# Altium PCB TramHanSTM8S_V2_HOAN_TAT.PcbDoc
Units mm, origin at the board's own origin, x right, y up, seen from the top; angles counter-clockwise.
Board outline 72.17 x 32.38 mm, 2 copper layers (Top Layer, Bottom Layer); 49 components, 43 nets, 180 pads, 116 vias.
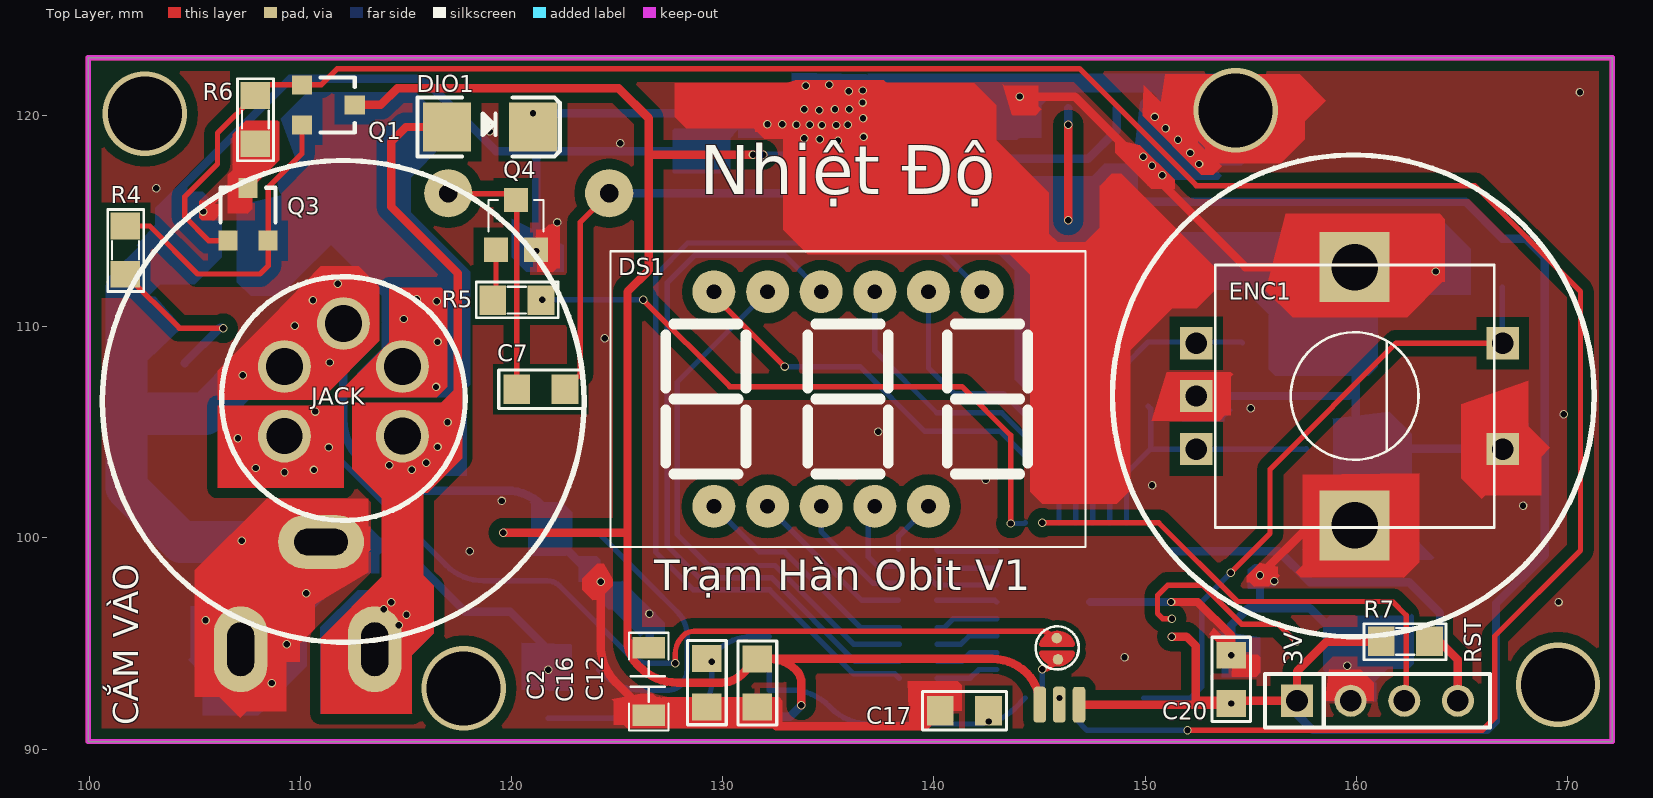
[diagram p0: Top Layer view]
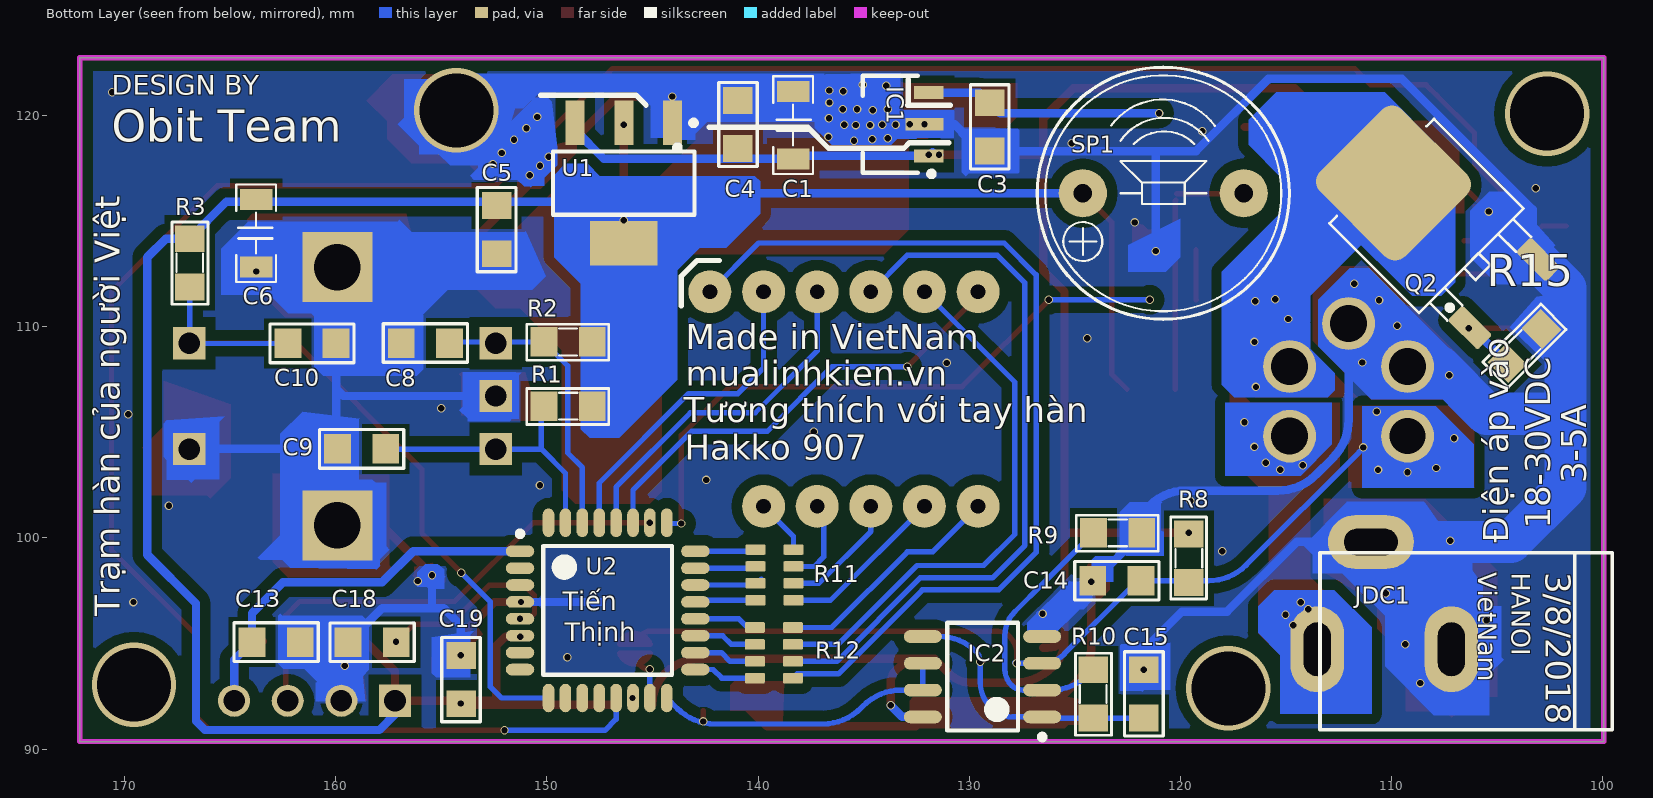
[diagram p1: Bottom Layer view, seen from below]
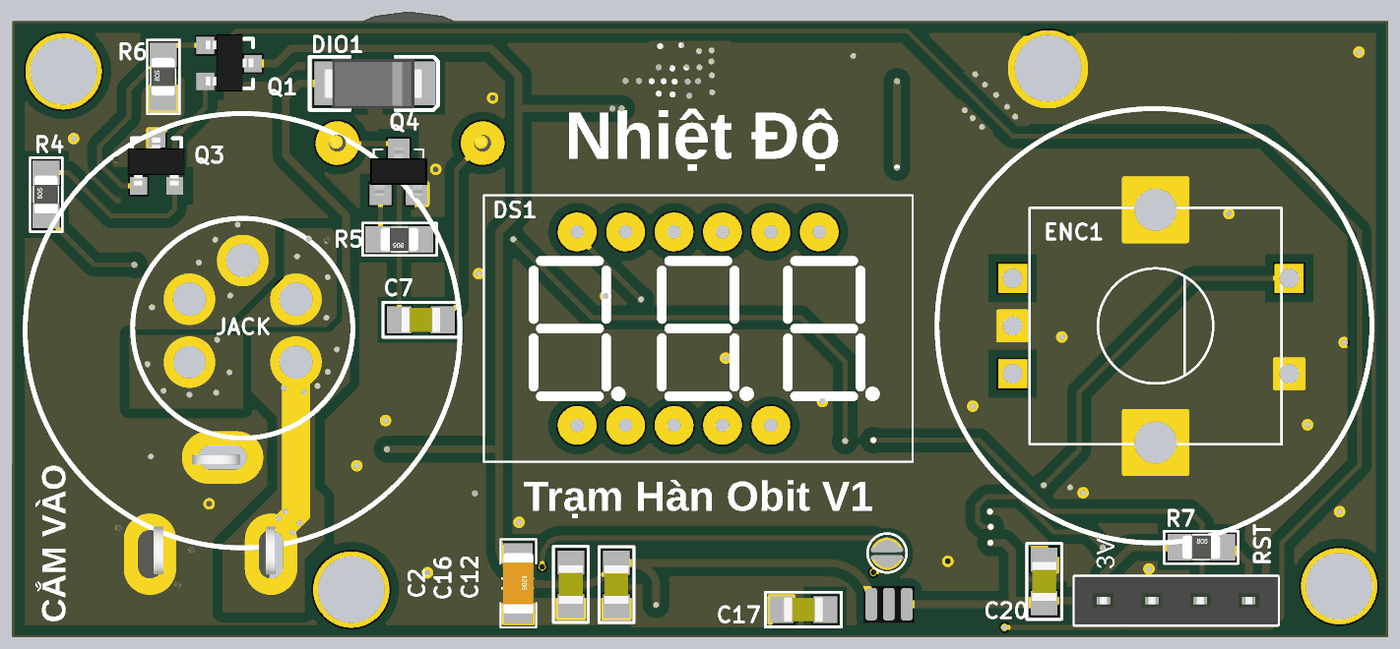
[diagram p2: 3D render of the assembled board from above, using the file's embedded part models]
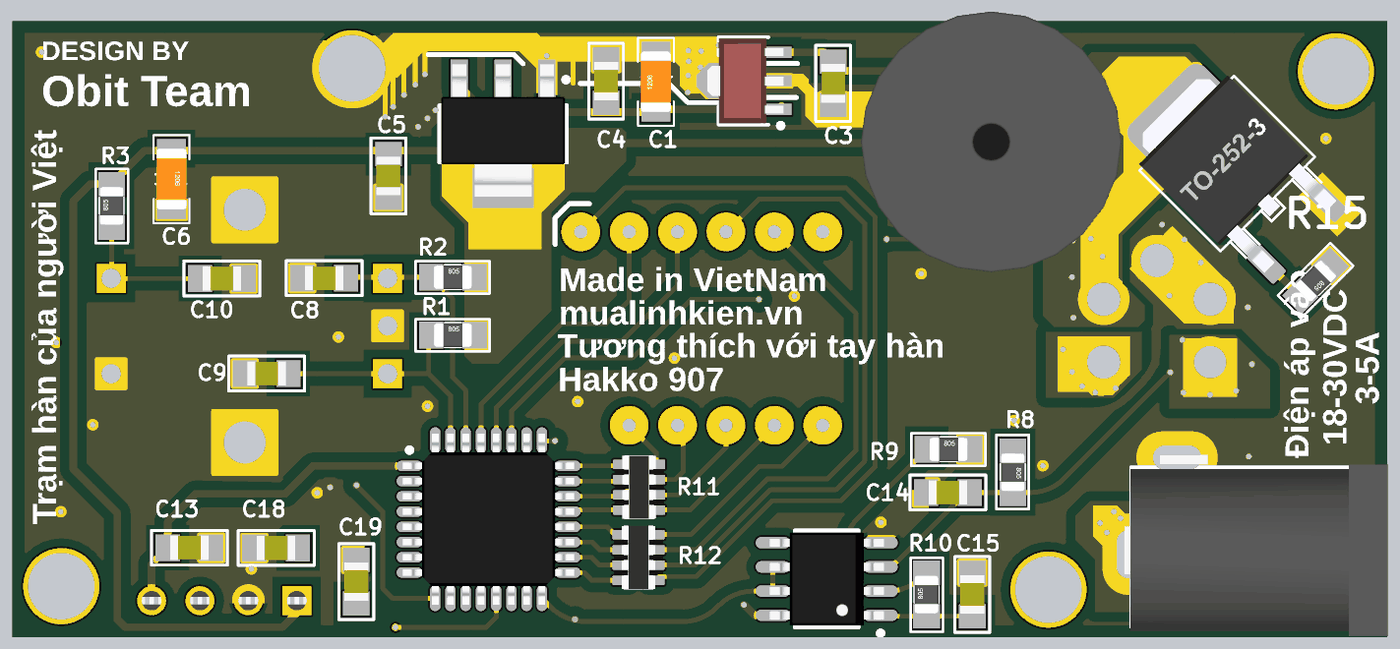
[diagram p3: 3D render of the assembled board from below, using the file's embedded part models]

## Layer stack, top to bottom
Top Solder: solder mask 0.0102, Solder Resist, Dk 3.5
Top Layer: signal copper 0.0356
Dielectric 1: dielectric 0.32, FR-4, Dk 4.8
Bottom Layer: signal copper 0.0356
Bottom Solder: solder mask 0.0102, Solder Resist, Dk 3.5

## Board outline
99.95,90.36 172.12,90.36 172.12,122.74 99.95,122.74

## Design rules (kind name [scope] priority, off if disabled: settings)
Clearance [All] p1: gap=0.1 ignorepadtopadclearanceinfootprint=FALSE
PolygonConnect [All] p1: connectstyle=Relief reliefconductorwidth=0.254 reliefentries=4 polygonreliefangle="90 Angle" airgapwidth=0.254
RoutingVias [All] p1: holewidth=0.3 width=0.4 viastyle="Through Hole" minholewidth=0.3 minwidth=0.4 maxholewidth=0.3 maxwidth=0.4
SolderMaskExpansion [All] p1: expansion=0.102
Width [All] p1: maxlimit=2 minlimit=0.254 preferedwidth=0.4
30 further rules are at their usual default settings.

## Components (designator, comment, footprint, x,y, rotation, side; value= is the part's Value field where it differs from the comment)
C1 "CAP" "C 1206" 138.337,119.549 r90 bottom value=*uF
C2 "CAP" "C 1206" 126.492,93.202 r270 top value=*uF
C3 "104" SM-0805 129.031,119.464 r90 bottom value=103
C4 "104" SM-0805 140.951,119.578 r270 bottom value=103
C5 "104" SM-0805 152.378,114.6 r90 bottom value=103
C6 "CAP" "C 1206" 163.765,114.433 r270 bottom value=*uF
C7 "104" SM-0805 121.386,107.041 r180 top value=103
C8 "104" SM-0805 155.75,109.23 r0 bottom value=103
C9 "104" SM-0805 158.77,104.22 r0 bottom value=103
C10 "104" SM-0805 161.12,109.21 r180 bottom value=103
C12 "106" SM-0805 131.638,93.131 r90 top value=103
C13 "104" SM-0805 162.82,95.07 r0 bottom value=103
C14 "104" SM-0805 123.01,97.97 r180 bottom value=103
C15 "104" SM-0805 121.73,92.613 r90 bottom value=103
C16 "104" SM-0805 129.247,93.145 r270 top value=103
C17 "104" SM-0805 141.445,91.821 r180 top value=103
C18 "106" SM-0805 158.272,95.059 r0 bottom value=103
C19 "104" SM-0805 154.064,93.291 r90 bottom value=103
C20 "104" SM-0805 154.081,93.306 r90 top value=103
DIO1 "Diode SMD" DIO-SMD-106 118.978,119.46 r180 top value=1N5007
DS1 "7SEG" "LED 7 SEG 3 DIGIT" 135.93,106.579 r0 top
ENC1 "enc" ENC 159.793,116.881 r270 top locked
IC1 "LM7805 SOT89" SOT89-321 133.715,119.59 r0 bottom
IC2 "LM358" SO8 129.37,93.43 r0 bottom
JACK "907" "jack 907" 115.719,107.868 r180 top locked (schematic designator "jack 1")
JDC1 "Jac DC" DC0 110.345,97.27 r0 bottom
Q1 "2N3904" SOT23-231 111.323,120.505 r270 top value=C1815
Q2 "IRF840" TO252-123 107.289,114.188 r135 bottom
Q3 "2N3906" SOT23-231 107.519,115.328 r0 top value=A1015
Q4 "C1815" "SOT 23" 120.213,114.821 r0 top
R1 "10k" SM-RES-0805 150.136,106.24 r180 bottom value="R1/4W - 1K"
R2 "10k" SM-RES-0805 150.14,109.28 r180 bottom value="R1/4W - 1K"
R3 "10k" SM-RES-0805 166.91,111.884 r90 bottom value="R1/4W - 1K"
R4 "22R" SM-RES-0805 101.717,112.483 r90 top value="R1/4W - 1K"
R5 "1k" SM-RES-0805 121.396,111.259 r180 top value="R1/4W - 1K"
R6 "1k" SM-RES-0805 107.863,118.67 r90 top value="R1/4W - 1K"
R7 "10k" SM-RES-0805 161.177,95.101 r0 top value="R1/4W - 1K"
R8 "10k" SM-RES-0805 119.6,100.18 r270 bottom value="R1/4W - 1K"
R9 "1k" SM-RES-0805 124.116,100.24 r180 bottom value="R1/4W - 1K"
R10 "24k" SM-RES-0805 124.13,91.47 r90 bottom value="R1/4W - 1K"
R11 "RP330" RESCAXS50P160X320X70-8N 139.22,98.25 r180 bottom
R12 "RP330" RESCAXS50P160X320X70-8N 139.25,94.56 r180 bottom
R15 "10k" SM-RES-0805 102.9,109.892 r315 bottom value="R1/4W - 1K"
RST "JP4" JP4-C1T 157.19,92.29 r0 top (schematic designator C11)
SB "" SB_3 147.538,93.318 r180 top
SB2 "SB" SB 144.228,96.352 r270 top
SP1 "Speaker" SPEAKER 120.81,116.32 r180 bottom locked value="Speaker Chip"
U1 "AMS1117" "SOT 223" 146.357,116.803 r0 bottom
U2 "STM8S003K3" TQFP32 147.12,96.57 r180 bottom

## Footprints (in the part's own frame and the unit in brackets; to place one, negate y for a bottom-side part, rotate by r counter-clockwise, add the part's x,y. Pads: shape width x height; smd on the part's side, far side on the other; paste and mask are expansions set on the pad)
"C 1206" [mm]
  rect 1x1.524 smd: 1(-1.6,0) 2(1.6,0)
  silkscreen extent -2.31,-0.94 2.31,0.94, body extent -1.6,-0.8 1.6,0.8, height 1
DC0 [mil] "Jac DC input"
  oval 100x160 hole 50 slot 100 at 90 deg: 1(125,100) 2(-125,100)
  oval 160x100 hole 50 slot 100 at 0 deg: 3(25,-100)
  silkscreen extent -425,-80 120,250, body extent -410,-105 134,269, height 434
DIO-SMD-106 [mil]
  rect 90x90.55 smd: 1(80,0) 2(-80,0)
  silkscreen extent -130,-55 135,55, body extent -99,-50 106,52, height 95
ENC [mil] "encoder"
  rect 60x60 hole 40: A(301.57,-290.28) B(499,-290.28) C(400,-290.28) D(301.57,281) E(499,281)
  rect 130.51x130.5 hole 87: GND1(159.84,5)
  rect 130.5x130.5 hole 87: GND2(641,5)
  silkscreen extent 156,-255 645,265
"jack 907" [mm]
  round 2.5 hole 1.75: 1(0.889,3.048) 2(0.889,-0.254) 3(6.477,-0.254) 5(3.683,-2.286)
  round 2.5 hole 1.7: 4(6.477,3.048)
  silkscreen extent -2.09,-4.5 9.45,7.04
JP4-C1T [mm] "4 row, straight, gold plating"
  rect 1.52x1.52 hole 1.02: 1(0,0)
  round 1.52 hole 1.02: 2(2.54,0) 3(5.08,0) 4(7.62,0)
  silkscreen extent -1.52,-1.27 9.14,1.27, body extent -1.52,-1.25 9.14,1.25, height 8.51
"LED 7 SEG 3 DIGIT" [mil] "LD-3361BS"
  round 80 hole 27.56: 1(-250,-200) 2(-150,-200) 3(-50,-200) 4(50,-200) 5(150,-200) 6(250,200) 7(150,200) 8(50,200) 9(-50,200) 10(-150,200) 11(-250,200)
  round 30 on Top Overlay: 12(-165,-135) 12(100,-135) 12(360,-135)
  silkscreen extent -443,-276 443,276
RESCAXS50P160X320X70-8N [mm]
  round 0.254 on Mech15: 0(0,0)
  rrect25% 0.95x0.5 smd: 1(-0.9,1.2) 2(-0.9,0.4) 3(-0.9,-0.4) 4(-0.9,-1.2) 5(0.9,-1.2) 6(0.9,-0.4) 7(0.9,0.4) 8(0.9,1.2)
  Top Layer pour cut-out: -0.4,1.7 0.4,1.7 0.4,-1.7 -0.4,-1.7
  body extent -0.87,-1.68 0.88,1.67, height 0.7
SB [mm]
  round 0.5 smd: 1(1.095,1.585) 2(2.105,1.645)
  Top Layer region: 0.865,1.611 0.93,1.919 1.114,2.174 1.385,2.334 1.385,2.334 1.388,0.878 1.114,1.04 0.929,1.3 0.865,1.611
  Top Layer region: 2.321,1.612 2.256,1.92 2.072,2.176 1.8,2.335 1.8,2.335 1.803,0.879 2.075,1.042 2.258,1.301 2.321,1.612
  Top Layer lines w0.254: 0.867,1.601 ccw(c1.629,1.601) 0.938,1.279 ccw(c1.629,1.601) 1.388,0.878 1.385,2.334 ccw(c1.627,1.611) 0.865,1.611 ; 2.323,1.602 cw(c1.561,1.602) 2.306,1.444 cw(c1.561,1.602) 1.803,0.879 1.8,2.335 cw(c1.559,1.612) 2.321,1.612
  silkscreen extent 0.54,0.59 2.58,2.63
SB_3 [mm]
  rrect50% 0.6x1.7 smd: 1(0.67,1.215) 2(1.605,1.21) 3(2.53,1.21)
SM-0805 [mil] "Compoment SMD 80x50mil"
  rect 50x55 smd: 1(-45,0) 2(45,0)
  silkscreen extent -78,-36 78,36, body extent -40,-25 40,25, height 24
SM-RES-0805 [mil]
  rect 50x55 smd: 1(0,0) 2(90,0)
  silkscreen extent -32,-34 121,33, body extent 6,-25 84,25, height 31
SO8 [mm] "SOIC, 8-Leads, Body 4.9x3.9mm, Pitch 1.27mm, IPC High Density"
  oval 1.8x0.6 smd: 1(-2.825,1.905) 2(-2.825,0.635) 3(-2.825,-0.635) 4(-2.825,-1.905) 5(2.825,-1.905) 6(2.825,-0.635) 7(2.825,0.635) 8(2.825,1.905)
  silkscreen extent -2.95,-2.55 1.68,2.98, body extent -2.99,-2.45 3,2.45, height 1.6
SOT23-231 [mm]
  rect 0.9x0.95 smd mask+0: 1(0.95,-1.25)
  rect 0.9x0.95 smd: 2(-0.95,-1.25) 3(0,1.25)
  silkscreen extent -1.3,-0.38 1.3,1.25, body extent -1.52,-1.23 1.48,1.27, height 1.06
SOT89-321 [mm] "SOT89, 3-Leads, Body 4.55x2.55mm, Pitch 1.50mm, Lead Span 4.1mm, IPC Medium Density"
  rect 1.4x0.6 smd: 1(-1.8,-1.5) 3(-1.8,1.5)
  rect 1.8x0.6 smd: 2(-1.6,0)
  Top Layer region: -0.7,0.3 -0.05,0.95 1.85,0.95 2.5,0.3 2.5,-0.3 1.85,-0.95 -0.05,-0.95 -0.7,-0.3
  silkscreen extent -2.05,-2.3 1.32,2.47, body extent -2.08,-2.25 1.92,2.25, height 1.5
"SOT 23" [mil]
  rect 45x45 smd: 1(-37.4,-46.26) 2(37.4,-46.26) 3(0,46.26)
  silkscreen extent -51,-12 51,46, body extent -59,-50 59,50, height 43
"SOT 223" [mm]
  rect 0.9x2.1 smd: 1(-2.3,-2.85) 2(0,-2.85) 3(2.3,-2.85)
  rect 3.2x2.1 smd: 4(0,2.85)
  silkscreen extent -3.42,-2.97 3.35,1.5, body extent -3.25,-3.66 3.25,3.3, height 1.66
SPEAKER [mil]
  round 90 hole 35: 1(-150,0) 2(150,0)
  silkscreen extent -235,-235 235,235, body extent -267,-267 273,272, height 299
TO252-123 [mm]
  round 0.5 on Mech15: 0(0,0)
  rrect25% 1x2 smd: 1(-2.285,-3.7) 3(2.285,-3.7)
  rrect25% 5.5x5.7 smd: 2(0,3.7)
  silkscreen extent -3.5,-2.7 3.5,4.5, body extent -3.3,-3.95 3.3,5.76, height 2.31
TQFP32 [mm] "Thin QFP, 32-Leads, Body 9x9mm, Pitch 0.8mm, IPC Low Density"
  oval 1.35x0.55 smd: 1(-4.15,2.8) 2(-4.15,2) 3(-4.15,1.2) 4(-4.15,0.4) 5(-4.15,-0.4) 6(-4.15,-1.2) 7(-4.15,-2) 8(-4.15,-2.8) 17(4.15,-2.8) 18(4.15,-2) 19(4.15,-1.2) 20(4.15,-0.4) 21(4.15,0.4) 22(4.15,1.2) 23(4.15,2) 24(4.15,2.8)
  oval 0.55x1.35 smd: 9(-2.8,-4.15) 10(-2,-4.15) 11(-1.2,-4.15) 12(-0.4,-4.15) 13(0.4,-4.15) 14(1.2,-4.15) 15(2,-4.15) 16(2.8,-4.15) 25(2.8,4.15) 26(2,4.15) 27(1.2,4.15) 28(0.4,4.15) 29(-0.4,4.15) 30(-1.2,4.15) 31(-2,4.15) 32(-2.8,4.15)
  silkscreen extent -4.28,-3.05 3.05,3.75, body extent -4.5,-4.5 4.5,4.5, height 1.4

## Part data
C3 C4 C5 C7 C8 C9 C10 C12 C13 C14 C15 C16 C17 C18 C19 C20: library part CM, "Cap SMD"
DIO1: "Default Diode", Code - JEDEC=DO-214-AB, Published=8-Jun-2000, Publisher="Altium Limited", Revision="July-2002: Re-released for DXP Platform."
DS1: library part "LED 7 SEG 3 DIGIT"
ENC1: library part ENC
IC1: library part LM78xx, "Positive Voltage Regulator", ComponentLink1Description="Manufacturer Link", ComponentLink1URL=http://www.st.com/, ComponentLink2Description=Datasheet, ComponentLink2URL=http://www.st.com/stonline/products/literature/ds/2146/l78m05c.pdf, DatasheetVersion=Apr-1994, LatestRevisionDate=17-Jul-2002, LatestRevisionNote="Re-released for DXP Platform.", Note="Tab is connected to pin 3 (GND).", PackageDescription="TO, Thru-Hole, Vertical, Heatsink Mounted; 3 In-Line Leads; Pitch 2.54 mm; Pin sequence 1, 3, 2", PackageReference=ISOWATT220AB, PackageVersion=Jul-1998, Published=24-Aug-2001, Publisher="Altium Limited"
IC2: "Low-Power Dual Operational Amplifier"
JACK: library part "jack 907"
JDC1: library part DCIN, "Jac DC input"
Q1: library part 2N904, "NPN 600mW, ECB", =C2383
Q2: "MOSFET N - CHANNEL 500V - 0.75 - 8A - TO-220"
Q3: "PNP 600mW, ECB", =A1013
Q4: library part C1815_SMD
R1 R2 R3 R4 R5 R6 R7 R8 R9 R10 R15: library part R1/4W, "Resistor 1/4W"
R11 R12: library part ResPack
RST: "WR-PHD 2.54 mm Angled Socket Header", Manufacturer="W¨¹rth Elektronik eiSos GmbH", partNo=613004143121, ComponentLink1 Description=Manufacturer, ComponentLink1URL=http://www.we-online.com, ComponentLink2 Description=Datasheet, ComponentLink2URL=http://katalog.we-online.de/em/datasheet/6130xx143121.pdf, Created by="Karrer Zheng", Created Date="29 March 2013", NoPins=04
SB: library part SB_3
SP1: library part SPK, "Speaker Chip"
U1: library part AMS117
U2: "MCU 8BIT  8KB FLASH LQFP-32"

## Via types
v1: diameter 0.4, hole 0.3, Top Layer to Bottom Layer, tented both sides, 85 vias
v2: diameter 0.4, hole 0.3, Top Layer to Bottom Layer, 27 vias
v3: diameter 4, hole 3.5, Top Layer to Bottom Layer, 4 vias

## Nets (pads, with @x,y where several pads share a name; then routed paths per layer and width w, separated by ;. In a path a pad name is that pad's centre, name@x,y a point inside that pad or via, vN(x,y) a via of type N, cw(c..) or ccw(c..) an arc to the next point about the centre after c; other vN are vias at no path point)
3V3: C5.2 C6.1 C7.1 C19.1 C20.1 R1.2 R2.2 R3.2 R7.1 RST.1 SB.1 SP1.1 U1.2 U1.4 U2.6 | length 125.8
  Top Layer w0.254: C7.1 123.255,107.767 123.255,114.955 SP1.1
  Top Layer w0.4: v1(146.355,115.039) v1(146.355,119.57) ; SB.1 153.936,92.103 ccw(c153.936,92.308) v1(154.081,92.163) ; v1(151.252,95.329) 151.956,95.329 152.401,94.884 152.401,92.29 153.377,92.29 ; C20.1@154.081,92.29 RST.1 157.19,93.686 158.591,95.087 161.163,95.087 R7.1
  Bottom Layer w0.4: SP1.1 143.979,116.32 145.652,114.647 U1.4@146.355,114.647 ; v1(146.355,119.57) U1.2@146.355,120.347 ; R1.2 147.85,113.152 U1.4@146.355,114.647 ; RST.1 157.19,91.65 157.933,90.907 166.195,90.907 166.615,91.327 166.615,96.899 168.92,99.204 168.92,113.289 168.039,114.17 R3.2 166.91,114.185 165.169,115.926 147.634,115.926 U1.4@146.355,114.647
24V: DIO1.1 JACK.1 JDC1.1 | length 36.9
  Top Layer w0.4: JACK.1 116.125,104.82 117.457,106.152 117.457,112.529 114.297,115.689 114.297,118.759 114.998,119.46 DIO1.1
  Top Layer w2: JDC1.1 113.52,95.512 114.83,96.822 114.83,103.217 ; 114.83,103.447 JACK.1
  Bottom Layer w0.4: JDC1.1 JDC1.1@113.945,95.155 ; v1(113.945,96.618) JDC1.1@113.945,96.07 ; v1(114.2,103.447) 114.444,103.447 114.674,103.217 115.265,103.217 v1(115.275,103.227) ; v1(114.66,95.865) JDC1.1@114.378,95.865 ; 115.574,103.511 115.623,103.56 v1(115.957,103.56) ; JDC1.1@113.945,95.155 JDC1.1@113.945,95.992 ; JDC1.1@113.945,95.155 114.378,95.588 JDC1.1@114.378,95.865 ; JDC1.1@113.945,95.992 114.072,95.865 JDC1.1@114.378,95.865 ; JDC1.1@113.945,95.992 113.867,96.07 JDC1.1@113.945,96.07 ; JDC1.1@113.945,95.992 JDC1.1@113.945,96.07 ; JDC1.1@113.945,96.07 114.201,96.326 114.378,96.326 JDC1.1@114.378,95.865
  other v1: 115.025,96.368 114.301,96.963 116.493,104.308 116.968,105.484
"907 sensor": C14.2 IC2.3 JACK.4 R8.2 SB2.1 | length 39.9
  Top Layer w0.254: v2(127.748,94.065) 127.748,94.501 cw(c128.953,94.501) 128.101,95.353 cw(c128.654,94.8) 128.654,95.582 145.101,95.582 cw(c145.101,95.007) 145.507,95.414
  Top Layer w0.4: v1(107.88,103.313) 107.88,103.517
  Bottom Layer w0.254: JACK.4 JACK.4@109.731,104.82 ; 111.527,104.076 116.889,98.714 ccw(c118.685,100.51) 118.685,97.97 121.699,97.97 cw(c121.699,97.168) 122.266,97.735 125.505,94.496 ccw(c126.545,95.535) IC2.3 v2(127.748,94.065) ccw(c127.748,94.27) v2@127.859,94.098
  other v1: 109.247,103.104 110.642,103.22 111.339,104.285 107.043,104.715 110.697,105.986
GND: C1.2 C2.2 C3.1 C4.1 C5.1 C6.2 C8.2 C9.2 C10.2 C12.1 C13.1 C14.1 C15.2 C16.2 C17.2 C18.2 C19.2 C20.2 ENC1.C ENC1.E ENC1.GND1 ENC1.GND2 IC1.2 IC2.4 JACK.3 JACK.5 JDC1.2 JDC1.3 Q2.3 Q3.3 Q4.2 R6.1 R9.2 R15.1 RST.2 U1.1 U2.4 | length 249.8
  Top Layer w0.254: v1(105.401,115.455) 106.524,116.578 Q3.3 107.519,118.326 R6.1 ; v2(118.961,119.263) v2@119.029,119.263 ; v2@125.145,118.649 v2(125.145,118.694) ; v2(142.445,102.746) v2@142.473,102.746
  Top Layer w0.4: v1(107.269,107.699) v1@107.405,107.699 ; v1@108.593,93.13 v1(108.637,93.13) ; v1(121.163,113.585) Q4.2 ; v1(124.216,97.926) 124.216,94.93 ccw(c126.756,94.93) 124.96,93.134 C2.2 C12.1@130.969,91.602 ; C12.1 132.54,91.086 139.567,91.086 C17.2 ; v1(144.06,120.901) 146.666,120.901 154.746,112.821 ENC1.GND1 ; v1(151.228,96.968) 152.488,96.968 154.081,95.375 v1(154.081,94.449) ; v1(155.438,98.239) 157.799,100.6 ENC1.GND2
  Bottom Layer w0.254: Q2.3 103.133,113.187 Q2.3@103.326,113.187 ; Q2.3@103.326,113.38 v1(105.401,115.455) ; v2(126.527,96.408) v2@126.717,96.408 ; v2@148.97,94.357 v2(149.024,94.357) ; v2@150.326,102.454 v2(150.326,102.503) ; v2(163.765,112.617) C6.2
  Bottom Layer w0.4: Q2.3@103.326,113.187 103.326,113.38 103.326,115.559 109.507,121.74 115.838,121.74 119.257,118.321 121.263,118.321 ; v1@110.57,111.248 v1(110.593,111.248) ; JDC1.3 114.492,99.81 117.79,96.512 119.929,96.512 121.73,94.711 v2(121.73,93.756) ; JACK.5 112.036,105.589 ccw(c114.576,105.589) 112.78,103.793 113.589,102.984 ccw(c115.385,104.78) 115.385,102.24 119.763,102.24 cw(c119.763,99.894) 121.422,101.553 cw(c120.437,100.568) 121.83,100.568 R9.2 C14.1@124.1,97.97 ; v1(121.163,113.585) 121.163,118.221 121.263,118.321 ; C14.1@124.207,97.916 126.373,95.75 cw(c125.958,95.335) IC2.4 ; v1(132.819,119.59) v1(132.115,119.59) 130.692,119.59 129.423,118.321 C3.1 121.263,118.321 ; v1(133.934,121.409) 133.991,121.466 v1(135.046,121.466) 135.646,121.466 v1(135.963,121.149) 135.963,120.949 ; v1@134.641,119.552 v1(134.695,119.552) ; 134.782,119.767 v1(135.311,120.296) 135.963,120.949 ; v1(135.457,118.812) v1@135.49,118.812 ; v1(136.643,119.877) v1@136.643,119.9 ; v1@136.677,120.526 v1@136.677,120.64 ; U1.1@144.055,120.347 143.253,121.149 C1.2 136.164,121.149 135.963,120.949 ; 147.404,96.968 v1(151.228,96.968) ; C5.1 159.284,113.457 ENC1.GND1 ; ENC1.C 159.635,106.721 159.977,107.063 ; v1(154.081,94.449) 154.081,95.879 154.881,96.679 155.428,96.679 ; v1(155.438,98.239) 155.438,96.689 155.428,96.679 ; C8.2 159.957,109.23 C10.2 ; C18.2@159.433,94.99 159.73,94.693 RST.2 ; ENC1.GND2 159.913,100.607 C9.2 ; C13.1 161.666,95.059 C18.2 157.795,96.679 155.428,96.679 ; C6.2 159.932,112.833 ENC1.GND1 ; ENC1.E 166.917,104.22 C9.2 ; C9.2 159.977,104.284 159.977,107.063 ; ENC1.GND1 159.977,112.764 C10.2 ; 159.977,107.063 C10.2
  Bottom Layer w2: Q2.3@103.326,113.38 103.133,113.187 101.77,111.824 101.77,105.878 ; JDC1.2 107.17,99.778 107.138,99.81 104.359,99.81 101.77,102.399 101.77,105.878 ; v1@107.215,99.81 JDC1.3 ; JACK.5 111.274,110.154 JACK.3 107.739,108.122 105.495,105.878 101.77,105.878
  other v1: 109.359,94.967 105.509,96.104 107.215,99.866 111.384,108.309 109.734,110.05 111.768,112.04 150.814,117.176 150.325,117.631 152.553,117.707 149.904,118.052 152.131,118.231 151.557,118.855 134.587,118.877 133.858,118.921 136.666,118.989 150.966,119.395 135.381,119.552 133.488,119.573 134.119,119.573 135.925,119.573 150.46,119.936 134.576,120.248 133.858,120.302 135.994,120.299 136.62,120.618 136.632,121.187
  other v2: 159.574,93.956 169.575,96.964 110.272,97.377 156.117,97.959 118.021,99.377 167.894,101.53 119.528,101.751 137.365,105.029 169.814,105.85 155.002,106.139 131.068,108.287 124.413,109.462 122.162,114.941 103.167,116.56 170.588,121.102
  other v3: 154.28,120.25
LEFT: C8.1 ENC1.A R2.1 U2.30 | length 13.8
  Bottom Layer w0.254: U2.30 148.32,103.337 149.011,104.028 149.011,108.151 R2.1 154.557,109.28 C8.1
NetC3_2: C3.2 DIO1.2 IC1.1 | length 11.3
  Bottom Layer w0.4: v1(121.012,120.109) 128.533,120.109 C3.2 129.514,121.09 IC1.1
NetC7_2: C7.2 Q4.3 SP1.2 | length 12.1
  Top Layer w0.254: SP1.2 117.025,116.295 Q4.3@120.17,116.295 ; Q4.3 120.236,115.973 120.236,107.048 C7.2
NetC15_1: C15.1 C16.1 IC2.1 IC2.5 R10.1 | length 12.9
  Bottom Layer w0.254: C15.1 R10.1 126.412,91.47 ccw(c126.412,91.658) IC2.1 127.935,91.525 ccw(c127.935,92.993) 128.973,91.955 ccw(c127.754,93.174) 129.478,93.174 v1(129.478,94.135) cw(c130.164,94.135) 129.679,94.62 cw(c131.405,92.894) 131.405,95.335 IC2.5
NetC18_1: C18.1 U2.5 | length 9.5
  Top Layer w0.254: v1(151.27,96.17) 150.842,96.17 150.586,96.426 150.586,97.28 151.062,97.756 152.732,97.756 154.579,95.909 156.318,95.909 v1(157.146,95.081)
NetDS1_1: DS1.1 R12.8 | length 11.1
  Bottom Layer w0.254: DS1.1 131.734,99.345 132.933,99.345 136.518,95.76 R12.8
NetDS1_2: DS1.2 R11.5 | length 8
  Bottom Layer w0.254: DS1.2 136.569,97.05 R11.5
NetDS1_3: DS1.3 R11.6 | length 5.9
  Bottom Layer w0.254: DS1.3 134.66,100.315 137.125,97.85 R11.6
NetDS1_4: DS1.4 R11.7 | length 4.1
  Bottom Layer w0.254: DS1.4 136.892,101.191 136.892,99.096 137.338,98.65 R11.7
NetDS1_5: DS1.5 R11.8 | length 2.6
  Bottom Layer w0.254: R11.8 138.32,100.079 DS1.5
NetDS1_6: DS1.6 R12.5 | length 44.2
  Bottom Layer w0.254: R12.5 138.147,93.563 136.198,93.563 132.221,97.54 128.606,97.54 126.833,99.313 126.833,112.455 128.342,113.964 139.975,113.964 DS1.6
NetDS1_7: DS1.7 U2.29 | length 15.5
  Bottom Layer w0.254: DS1.7 139.74,108.043 140.95,106.833 143.289,106.833 147.52,102.602 U2.29
NetDS1_8: DS1.8 U2.28 | length 16.7
  Bottom Layer w0.254: DS1.8 137.2,108.859 140.131,105.928 143.206,105.928 146.72,102.414 U2.28
NetDS1_9: DS1.9 R12.6 | length 34.2
  Bottom Layer w0.254: DS1.9 132.937,113.382 128.669,113.382 127.369,112.082 127.369,99.644 128.904,98.109 132.322,98.109 136.271,94.16 R12.6
NetDS1_10: DS1.10 R12.7 | length 25.9
  Bottom Layer w0.254: DS1.10 127.843,107.382 127.843,100.17 129.318,98.695 132.474,98.695 136.209,94.96 R12.7
NetDS1_11: DS1.11 U2.27 | length 21.9
  Top Layer w0.254: DS1.11 129.58,111.463 v1(132.928,108.115)
  Bottom Layer w0.254: v1(132.928,108.115) 136.495,108.115 139.565,105.045 143.142,105.045 145.92,102.267 U2.27
NetIC2_2: IC2.2 R9.1 R10.2 | length 13.2
  Bottom Layer w0.254: R9.1 126.46,97.896 126.46,97.889 127.843,96.506 cw(c126.708,95.371) 128.313,95.371 128.313,93.78 cw(c127.244,93.78) 128,93.024 cw(c127.447,93.577) 127.447,92.795 IC2.2 126.143,92.795 cw(c126.143,95.335) 124.347,93.539 R10.2
"Netjack 1_2": JACK.2 Q2.2 | length 10.4
  Bottom Layer w2: Q2.2 114.83,111.879 v1@114.83,110.367 ; JACK.2 114.83,110.05
  other v1: 116.423,107.151 116.493,109.282 114.888,110.367 116.453,111.213 115.504,111.304
NetQ1_1: Q1.1 Q3.1 R4.2 | length 15.2
  Top Layer w0.254: R4.2 102.865,114.769 105.133,112.501 108.084,112.501 108.469,112.886 Q3.1 108.469,116.594 110.073,118.198 Q1.1
NetQ2_1: Q2.1 R4.1 R15.2 | length 8.2
  Top Layer w0.254: R4.1 104.268,109.932 v1(106.346,109.932)
  Bottom Layer w0.4: R15.2 106.196,109.956 Q2.1
NetQ4_1: Q4.1 R5.2 | length 2.4
  Top Layer w0.254: R5.2@119.254,111.27 119.263,111.279 Q4.1
NetR11_1: R11.1 U2.24 | length 2.9
  Bottom Layer w0.254: R11.1 140.2,99.37 U2.24
NetR11_2: R11.2 U2.23 | length 2.9
  Bottom Layer w0.254: R11.2 140.2,98.57 U2.23
NetR11_3: R11.3 U2.22 | length 3.3
  Bottom Layer w0.254: R11.3@139.837,98.053 140.12,97.77 U2.22
NetR11_4: R11.4 U2.21 | length 2.9
  Bottom Layer w0.254: R11.4 142.89,97.05 U2.21
NetR12_1: R12.1 U2.20 | length 3
  Bottom Layer w0.254: R12.1 140.498,95.76 140.908,96.17 U2.20
NetR12_2: R12.2 U2.19 | length 3
  Bottom Layer w0.254: R12.2 141.266,94.96 141.676,95.37 U2.19
NetR12_3: R12.3 U2.18 | length 3
  Bottom Layer w0.254: R12.3 141.327,94.16 141.737,94.57 U2.18
NetR12_4: R12.4 U2.17 | length 3
  Bottom Layer w0.254: R12.4 141.713,93.36 142.123,93.77 U2.17
NetSB2_2: SB2.2 U2.15 | length 2.3
  Top Layer w0.254: v2(145.12,93.78) ccw(c145.12,94.471) 145.609,93.983 145.672,94.046 SB2.2
  Bottom Layer w0.254: U2.15 v2(145.12,93.78)
NetSB_2: SB.2 U2.14 | length 0
  Bottom Layer w0.254: U2.14 v2(145.945,92.42)
OK: C10.1 ENC1.D R3.1 U2.9 | length 35.4
  Top Layer w0.254: v1(154.057,98.358) 155.915,100.216 155.915,103.251 161.885,109.221 ENC1.D
  Bottom Layer w0.254: U2.9 152.146,92.42 152.684,92.958 152.684,96.985 v1(154.057,98.358) ; C10.1 166.919,109.21 ENC1.D 166.91,109.242 R3.1
PWM: Q1.2 Q3.2 R6.2 U2.13 | length 120.5
  Top Layer w0.254: Q3.2 105.656,114.078 104.525,115.209 104.525,116.162 106.073,117.71 106.073,119.165 R6.2 108.362,121.455 Q1.2 110.981,121.455 111.747,122.221 146.883,122.221 152.425,116.679 165.607,116.679 170.615,111.671 170.615,99.411 166.548,95.344 166.548,91.479 165.961,90.892 v2@152.005,90.892
  Bottom Layer w0.254: U2.13 146.72,91.418 147.25,90.888 v2(152.005,90.888)
RIGHT: C9.1 ENC1.B R1.1 U2.31 | length 13.4
  Bottom Layer w0.254: U2.31 149.12,103.064 150.263,104.207 ; R1.1 150.263,106.113 150.263,104.207 ; C9.1 157.614,104.207 ENC1.B 150.263,104.207
RST: C13.2 R7.2 RST.4 U2.1 | length 22
  Top Layer w0.4: R7.2 163.933,95.101 164.81,94.224 RST.4
  Bottom Layer w0.4: U2.1 156.328,99.37 157.798,97.9 162.497,97.9 163.963,96.434 C13.2 164.81,94.223 RST.4
SENSOR: C17.1 IC2.6 IC2.7 U2.16 | length 14.7
  Top Layer w0.254: v1(142.588,91.31) C17.1
  Bottom Layer w0.254: IC2.6 IC2.7 133.225,92.795 cw(c133.225,90.255) 135.021,92.051 135.135,91.937 ccw(c136.931,93.733) 136.931,91.193 142.041,91.193 ccw(c142.041,93.733) 143.837,91.937 U2.16
SPK: R5.1 U2.25 | length 29.7
  Top Layer w0.254: v1(126.227,111.275) 130.338,107.164 141.328,107.164 143.637,104.855 v1(143.637,100.684)
  Bottom Layer w0.254: v1(121.456,111.275) v1(126.227,111.275) ; v1(143.637,100.684) 144.284,100.684 U2.25
SWIM: RST.3 U2.26 | length 23.1
  Top Layer w0.254: v1(145.12,100.72) 150.637,100.72 154.367,96.99 161.709,96.99 162.358,96.341 162.358,92.378 RST.3
VCC: C1.1 C2.1 C4.2 C12.2 IC1.3 IC2.8 Q1.3 R8.1 SB.3 U1.3 | length 99.2
  Top Layer w0.4: Q1.3 113.801,120.505 114.593,121.297 125.069,121.297 126.492,119.874 126.492,118.21 ; v1(119.607,100.245) 125.489,100.245 ; C2.1 126.303,94.802 cw(c126.303,95.953) 125.489,95.139 ; v1(131.915,118.14) 126.562,118.14 126.492,118.21 ; v1(133.718,92.074) 133.718,93.14 ccw(c132.841,93.14) 133.461,93.76 ccw(c132.22,92.519) C12.2@132.22,94.274 ; SB.3 ccw(c142.893,92.108) 144.389,93.603 ccw(c142.77,91.984) 142.77,94.274 C12.2@132.22,94.274 ; 125.489,95.139 ccw(c127.126,95.139) 125.968,93.982 126.054,93.896 ccw(c127.85,95.692) 127.85,93.152 129.961,93.152 ccw(c129.961,94.491) 130.908,93.544 C12.2 C12.2@132.22,94.274 ; 125.489,95.139 125.489,100.245 ; 125.489,100.245 125.489,111.668 126.492,112.671 126.492,118.21
  Bottom Layer w0.4: v1(131.429,118.138) 131.613,118.138 131.74,118.265 IC1.3 138.196,118.09 C1.1 C4.2@140.465,117.949 ; IC2.8 133.169,91.525 v1(133.718,92.074) ; C4.2 C4.2@140.465,117.949 ; U1.3@148.655,119.673 U1.3@148.655,120.347 ; U1.3 148.657,119.306 147.3,117.949 C4.2@140.465,117.949
pads on no net: DS1.12 Q2.0 R11.0 R12.0 U2.2 U2.3 U2.7 U2.8 U2.10 U2.11 U2.12 U2.32
copper on no net: | length 209.1
  Top Layer w0.254: 99.95,90.36 99.95,122.74 172.12,122.74 172.12,90.36 171.968,90.36 99.95,90.36
  other v3: 117.731,92.872 169.55,93.05 102.64,120.09

## Polygon pours and split planes (outlines as drawn)
GND on Top Layer "drdr" (solid, pour order 26): 99.95,122.74 99.95,90.36 172.12,90.36 172.12,122.74
GND on Bottom Layer "drdr" (solid, pour order 28): 99.95,122.74 99.95,90.36 172.12,90.36 172.12,122.74

## Keep-outs
Keep-Out Layer:
  the board outline again, w0.254

## Other copper
Top Layer:
  region net 24V: 113.91,98.208 110.963,95.261 110.963,91.664 115.292,91.664 115.276,91.68 115.276,94.445 116.325,95.494 116.325,97.725 115.825,98.225 115.376,98.225
  region net "907 sensor": 106.078,106.255 112.058,106.255 112.058,102.379 106.085,102.379
  region net 24V: 117.299,107.036 116.668,106.405 112.463,106.405 112.463,103.277 114.005,101.735 114.416,102.146 116.019,102.146 117.653,103.78 117.653,107.075 117.476,107.252
  region net "Netjack 1_2": 112.693,107.755 114.208,109.27 114.208,111.852 116.658,111.852 116.958,111.552 116.958,107.155 116.468,106.665 111.596,106.665
  region net GND: 108.254,118.695 108.254,117.598 107.719,117.063 107.719,115.571 107.706,115.571 107.477,115.342 107.439,115.38 106.559,115.38 106.559,117.191 106.788,117.42 106.788,118.733 107.26,119.205 107.503,118.962 108.076,118.962
  region net GND: 105.363,115.977 105.363,115.807 105.324,115.768 105.478,115.614 105.737,115.614 105.737,115.691 105.879,115.833 105.879,116.036
  region net GND: 105.248,115.424 105.221,115.451 105.221,115.954 105.293,116.026 105.523,115.796 106.161,115.796 106.161,115.397 106.208,115.35 105.911,115.053 105.337,115.053 105.329,115.045 105.221,115.153 105.221,115.539
  region net GND: 121.753,114.826 121.531,114.604 121.159,114.604 121.159,114.307 121.115,114.263 121.204,114.174 121.204,112.616 121.931,112.616 121.96,112.587 122.138,112.765 122.287,112.765 122.287,114.842 122.405,114.96
  region net GND: 143.262,121.48 143.319,121.423 144.932,121.423 144.932,120.443 145.085,120.29 144.817,120.022 143.722,120.022 143.684,120.06
  region net GND: 156.656,115.343 163.949,115.343 164.194,115.098 164.194,112.124 164.071,112.124 162.401,110.454 156.982,110.454 155.719,111.717
  region net GND: 164.968,106.339 164.968,102.835 165.946,101.857 166.109,102.02 168.757,102.02 168.757,103.854 169.164,104.261 168.146,105.279 168.146,107.439
  region net GND: 157.469,102.981 157.469,98.708 157.14,98.379 157.372,98.147 162.207,98.147 162.245,98.109 162.979,98.843 162.979,103.059
  region net GND: 155.421,98.818 154.816,98.213 154.816,97.913 154.954,97.913 155.17,97.697 155.178,97.705 155.863,97.705 156.371,98.213 156.286,98.298 156.286,98.644
  region net GND: 154.14,94.479 155.325,94.479 155.45,94.354 155.45,93.63 155.254,93.434 154.126,93.434 154.112,93.448
  region net GND: 124.783,98.054 124.783,97.727 124.345,97.289 124.345,97.063 123.856,97.063 123.845,97.052 123.35,97.547 123.35,98.071 124.047,98.768 124.363,98.768
  region net GND: 138.824,91.223 140.018,91.223 140.605,91.81 141.325,91.81 141.325,93.024 141.137,93.212 138.767,93.212
  region net GND: 126.408,92.326 126.937,91.797 126.937,92.185 127.131,92.379 127.025,92.485 126.999,92.485
  region net GND: 127.105,92.423 127.132,92.45 132.664,92.45 132.815,92.299 132.815,91.161 132.615,91.161 132.453,90.999 125.467,90.999 125.128,91.338
  region net GND: 126.1,92.631 126.688,92.631 126.912,92.407 126.865,92.36 126.865,91.51 126.254,91.51 125.898,91.154 124.831,91.154 124.831,92.268 124.746,92.353
  region net GND: 113.211,98.371 113.211,101.687 113.211,101.861 112.693,101.861 108.399,101.861 105.005,98.467 105.005,92.486 106.155,92.486 107.152,91.489 107.458,91.795 109.338,91.795 109.338,94.364 110.68,95.706 110.68,96.857
  region net GND: 151.013,107.855 154.051,107.855 154.163,107.743 154.051,107.631 154.051,105.808 153.779,105.808 153.523,105.552 150.309,105.552
  region net GND: 108.65,110.479 106.089,107.918 106.089,106.549 110.954,106.549 113.745,109.34 113.745,111.878 112.754,112.869 110.962,112.869
  region net GND: 127.765,121.526 141.909,121.526 142.953,120.482 142.953,118.841 145.442,116.352 145.442,114.413 145.864,113.991 147.16,113.991 147.847,114.678 147.847,116.686 147.873,116.686 148.428,117.241 148.878,117.241 153.318,112.801 153.318,111.745 152.445,110.872 151.283,110.872 149.301,108.89 149.301,102.256 148.667,101.622 145.124,101.622 144.57,102.176 144.57,112.457 143.591,113.436 134.024,113.436 132.861,114.599 132.861,119.065 132.517,119.409 128.262,119.409 127.734,119.937 127.734,121.523
  region net GND: 130.681,120.194 131.535,119.34 131.535,119.227 131.632,119.227 131.954,118.905 132.872,118.905 132.872,119.727 133.146,120.001 132.357,120.79 131.39,120.79
  region net GND: 150.942,121.946 157.312,121.946 158.545,120.713 157.564,119.732 157.564,118.887 156.422,117.745 152.837,117.745 152.837,118.476 150.737,120.576
  region net GND: 149.878,119.986 152.659,117.209 153.228,117.209 153.618,117.599 152.494,118.723 152.494,118.956 152.409,118.956 149.93,121.435
  region net GND: 149.742,118.602 151.391,116.953 151.391,116.5 151.356,116.535 150.278,116.535 148.574,118.239 148.574,118.87
  region net GND: 133.43,121.684 137.624,121.684 137.832,121.476 137.491,121.135 137.491,120.521 133.808,120.521 133.16,121.169 131.987,121.169
  region net GND: 106.793,119.126 107.42,119.753 108.938,119.753 108.99,119.701 108.99,117.875 107.646,116.531 107.279,116.531 107.279,117.153 106.77,117.662 106.787,117.679 106.787,118.561
  region net GND: 158.519,92.293 160.77,92.293 160.806,92.257 160.829,92.28 160.829,93.143 160.207,93.765 158.734,93.765 158.722,93.777
  region net GND: 153.045,95.446 153.996,94.495 153.996,94.27 154.242,94.516 154.081,94.677 154.081,95.375 153.629,95.375 153.25,95.754
  region net GND: 112.992,100.731 113.191,100.532 113.307,100.532 113.307,99.451 113.328,99.43 112.877,98.979 112.877,98.894
  region net GND: 108.363,96.175 108.363,95 109.245,94.118 109.256,94.129 109.979,94.129 109.979,95.241 110,95.262
Bottom Layer:
  region net GND: 102.391,108.472 102.391,108.447 102.796,108.447 104.413,109.974 103.123,111.427 102.42,111.55
  region net 3V3: 139.896,116.279 139.896,115.351 141.505,113.742 142.75,113.742 143.824,112.668 143.824,107.496 146.581,104.739 147.971,104.739 148.386,105.154 148.386,112.033 149.655,113.302 149.655,117.182 149.119,117.718 148.069,117.718 147.484,117.133 140.151,117.133 139.897,116.879
  region net 24V: 112.71,97.53 110.951,95.771 110.951,91.683 115.277,91.683 115.277,94.456 116.323,95.502 116.307,95.518 116.307,96.769 115.546,97.53
  region net GND: 110.454,106.574 110.971,106.574 113.464,109.067 113.464,111.287 111.981,112.77 111.074,112.77 106.694,108.39 106.694,106.576
  region net "Netjack 1_2": 118.035,107.256 117.451,106.672 113.014,106.672 112.681,107.005 112.681,107.795 114.366,109.48 117.088,109.48
  region net "907 sensor": 111.389,106.242 111.389,102.394 111.401,102.382 111.389,102.37 106.111,102.37 106.087,102.394 106.099,102.406 106.099,104.431 107.91,106.242
  region net 24V: 112.826,106.413 117.858,106.413 117.874,106.397 117.874,102.945 114.306,102.945 112.823,104.428 112.823,106.151
  region net 24V: 113.035,96.248 114.057,97.27 115.615,97.27 115.752,97.133 115.752,96.485 114.281,95.014
  region net "Netjack 1_2": 106.987,115.723 106.987,112.117 107.643,111.461 109.026,111.461 112.328,114.763 112.351,114.763 112.351,115.465 111.109,116.707
  region net GND: 104.956,115.8 104.64,116.116 104.64,116.893 104.578,116.893 103.358,115.673 103.358,114.791
  region net "Netjack 1_2": 109.062,119.841 110.322,121.102 115.465,121.102 116.764,119.803 116.764,118.607 115.216,117.059 115.216,115.414 118.035,112.595 118.035,107.256 117.876,107.097 114.442,107.097 114.442,109.758 114.6,109.916 114.6,112.457 114.123,112.457 110.471,116.109
  region net 24V: 113.83,104.54 113.88,104.49 113.88,103.371 114.306,102.945 115.791,102.945 115.791,104.694 115.481,105.004
  region net GND: 104.802,96.772 104.802,94.369 105.285,93.886 105.511,94.112 107.494,94.112 107.494,96.239 108.021,96.765
  region net GND: 108.41,101.638 108.475,101.703 112.119,101.703 112.119,101.682 114.168,99.633 113.737,99.202 113.737,98.339 112.335,98.339 110.308,96.312 110.308,93.918 108,91.61 105.369,91.61 105.369,93.573 104.701,94.241 105.693,95.233 105.693,97.757
  region net GND: 120.009,115.122 120.009,113.286 120.684,112.611 122.466,112.611 122.466,113.853 122.439,113.88
  region net GND: 153.445,95.616 153.635,95.426 153.635,93.399 155.243,93.399 155.446,93.602 155.446,95.287
  region net GND: 158.588,92.247 158.6,92.259 160.944,92.259 160.944,93.133 160.88,93.197 161.488,93.805 162.489,93.805 162.717,94.033 162.717,96.326 162.629,96.414 162.541,96.326 158.753,96.326 158.436,96.009 158.436,93.754 158.727,93.463
  region net GND: 165.249,105.773 165.521,105.501 165.521,102.788 166.666,102.788 166.843,102.611 166.979,102.747 167.988,102.747 167.988,103.687 168.151,103.85 168.151,105.419 167.988,105.582
  region net GND: 158.87,105.65 158.911,105.609 158.911,102.761 158.257,102.761 158.107,102.611 157.616,102.611 157.616,99.612 157.453,99.449 157.944,98.958 163.572,98.958 163.681,99.067 162.618,100.13 162.618,104.928 161.569,105.977
  region net GND: 151.476,107.845 153.987,107.845 153.987,106.207 154.144,106.05 153.756,105.662 153.756,105.528 151.768,105.528 151.658,105.638 151.342,105.638 151.342,107.7 151.209,107.833
  region net GND: 150.997,114.534 151.05,114.481 156.405,114.481 156.986,115.062 157.065,114.983 164.136,114.983 165.429,113.69 165.429,111.526 163.133,111.526 162.236,110.629 161.155,110.629 161.023,110.497 161.023,108.097 160.6,107.674 156.169,107.674 155.852,107.991 155.852,110.551 155.878,110.577 154.691,111.764 150.68,111.764 150.047,112.397
  region net GND: 136.858,121.982 144.794,121.982 145.088,121.688 145.088,118.952 144.052,118.952 143.954,118.854 142.977,118.854 142.977,119.146 142.409,119.714 137.17,119.714 136.838,120.046
  region net GND: 130.707,120.219 130.742,120.254 133.738,120.254 133.738,119.512 133.819,119.431 133.686,119.298 133.686,118.904 132.503,118.904 132.463,118.944 130.736,118.944
  region net GND: 127.636,119.309 127.7,119.373 130.226,119.373 130.516,119.083 130.354,118.921 130.354,117.322 130.168,117.136 130.034,117.27 127.682,117.27 127.636,117.316
  region net GND: 124.207,97.916 125.173,97.916 125.241,97.984 127.242,95.983 127.242,95.445 126.223,95.445 126.093,95.315 124.777,96.631 124.574,96.631 124.166,97.039
  region net GND: 121.545,100.171 121.465,100.251 120.927,100.251 120.927,101.61 120.852,101.685 122.389,101.685 122.862,101.212 122.862,99.566 122.753,99.457 122.474,99.736 122.087,99.736
  region net GND: 120.449,95.027 120.489,94.987 120.489,92.814 121.705,92.814 121.805,92.714 121.845,92.754 122.841,92.754 122.841,94.928 122.802,94.967
  region net GND: 112.68,111.737 113.103,111.351 113.103,109.223 112.495,108.615 110.454,106.574 107.857,106.574 107.857,107.687 107.115,108.429 108.244,109.558 108.244,109.913 108.924,109.913 111.459,112.448
  region net GND: 104.516,116.398 105.367,116.398 106.279,115.486 106.279,113.288 104.995,112.004 103.077,112.004 103.077,113.041 102.257,113.861
  region net GND: 151.146,121.602 151.261,121.717 156.744,121.717 156.744,119.903 157.066,119.581 156.049,118.564 156.049,118.166 155.11,118.166 154.582,117.638 152.298,117.638
  region net GND: 133.273,122.017 133.273,119.51 133.699,119.084 133.699,118.612 136.508,118.612 137.321,119.425 137.321,121.438 136.793,121.966
  region net GND: 144.794,121.982 144.796,121.98 153.407,121.98 153.882,121.505 152.912,120.535 152.912,120.343 151.113,120.343 150.345,121.111 145.738,121.111 144.939,120.312 144.201,121.05 144.14,121.05
  region net GND: 149.518,118.48 149.517,118.479 149.517,117.653 150.113,117.057 150.113,116.676 150.694,116.676 150.769,116.601 150.822,116.654 151.078,116.654 151.395,116.971 153.454,116.971 153.635,117.152 153.251,117.536 153.251,118.156 150.709,120.698 150.709,120.84 149.947,120.84 149.758,120.651
  region net GND: 120.786,100.283 120.786,99.151 122.571,99.151 122.762,99.342 122.762,99.835 122.343,99.835 121.572,100.606
  region net GND: 123.094,98.881 123.175,98.8 123.175,97.921 123.741,97.921 123.773,97.889 124.205,98.321 124.205,98.972 124.035,99.142 123.081,99.142
  region net GND: 158.111,98.512 158.051,98.512 157.887,98.676 157.909,98.699 157.909,99.304 158.075,99.47 158.264,99.281 162.76,99.281 162.76,99.204 162.149,98.593
  region net GND: 155.169,98.758 155.756,98.758 156.142,98.372 156.142,97.696 155.687,97.696 155.49,97.499 155.394,97.595 154.847,97.595 154.847,98.123 154.805,98.165 154.851,98.211 154.851,98.528

## Silkscreen, mask and mechanical layers (free items; w line width, h text height)
Top Overlay:
  circle w0.254: c159.86,106.73 r11.405
  circle w0.254: c112.03,106.47 r11.405
  lines w0.005: 161.845,117.778 161.85,117.778
  text "Nhiệt Độ" at 128.915,115.499 h4
  text "Trạm Hàn Obit V1" at 126.745,97.019 h2.5
  text "3V" at 157.753,93.94 h1.52 r90
  text "CẮM VÀO" at 102.731,91.133 h2 r90
Bottom Overlay:
  lines w0.254: 130.905,120.497 132.921,120.497 132.893,120.525 132.893,121.706 ; 130.962,118.719 132.83,118.719 133.096,118.453 136.657,118.453 137.655,119.451 142.311,119.451 ; 141.829,113.139 142.892,113.139 143.63,112.401 143.63,110.996 ; 145.305,120.491 145.782,120.968 150.286,120.968
  text "DESIGN BY" at 170.599,120.679 h1.6
  text "Obit Team" at 170.594,118.269 h2.6
  text "Made in VietNam" at 143.425,108.54 h2
  text "mualinhkien.vn" at 143.425,106.794 h2
  text "Tương thích với tay hàn" at 143.511,105.074 h2
  text "Hakko 907" at 143.475,103.309 h2
  text "3-5A" at 100.391,102.6 h2 r270
  text "18-30VDC" at 102.092,100.441 h2 r270
  text "Điện áp vào" at 104.073,99.781 h2 r270
  text "3/8/2018" at 103.1,98.377 h2 r90
  text "VietNam" at 106.207,98.368 h1.52 r90
  text "HANOI" at 104.62,98.345 h1.52 r90
  text "Trạm hàn của người Việt" at 169.813,96.301 h2 r270
  text "Tiến" at 149.247,96.259 h1.52
  text "Thịnh" at 149.153,94.804 h1.52
Top Solder:
  region: 114.088,104.166 114.088,97.099 113.176,96.187 113.899,95.464 113.899,94.951 115.578,96.63 115.578,104.324 114.983,104.919
Bottom Solder:
  drawing of 41 lines, arcs and shapes, not listed